# Altium PCB STS_WINGS.00.PcbDoc
Units mm, origin at the board's own origin, x right, y up, seen from the top; angles counter-clockwise.
Board outline 66.68 x 49.49 mm, 2 copper layers (Top Layer, Bottom Layer), stack 0.971 mm thick; 2 components, 4 nets, 7 pads, 2 vias.
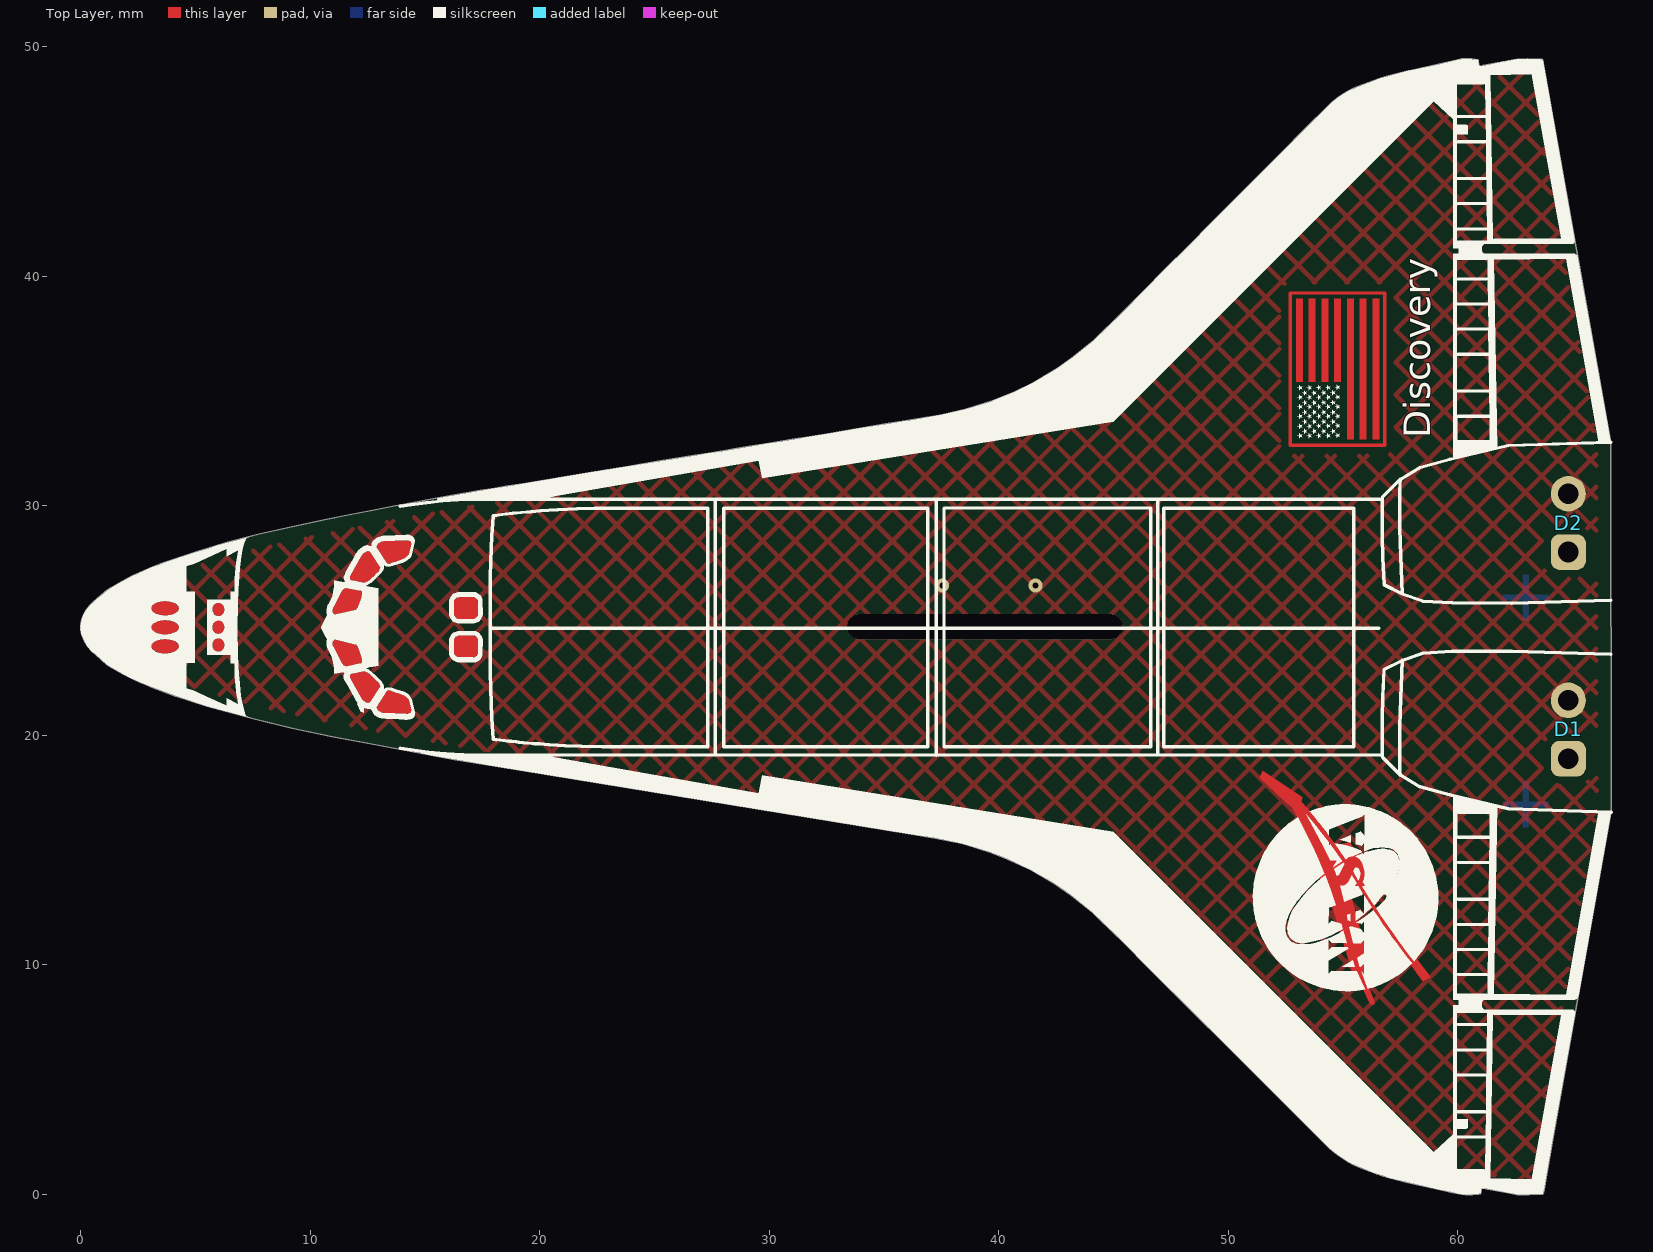
[diagram p0: Top Layer view]
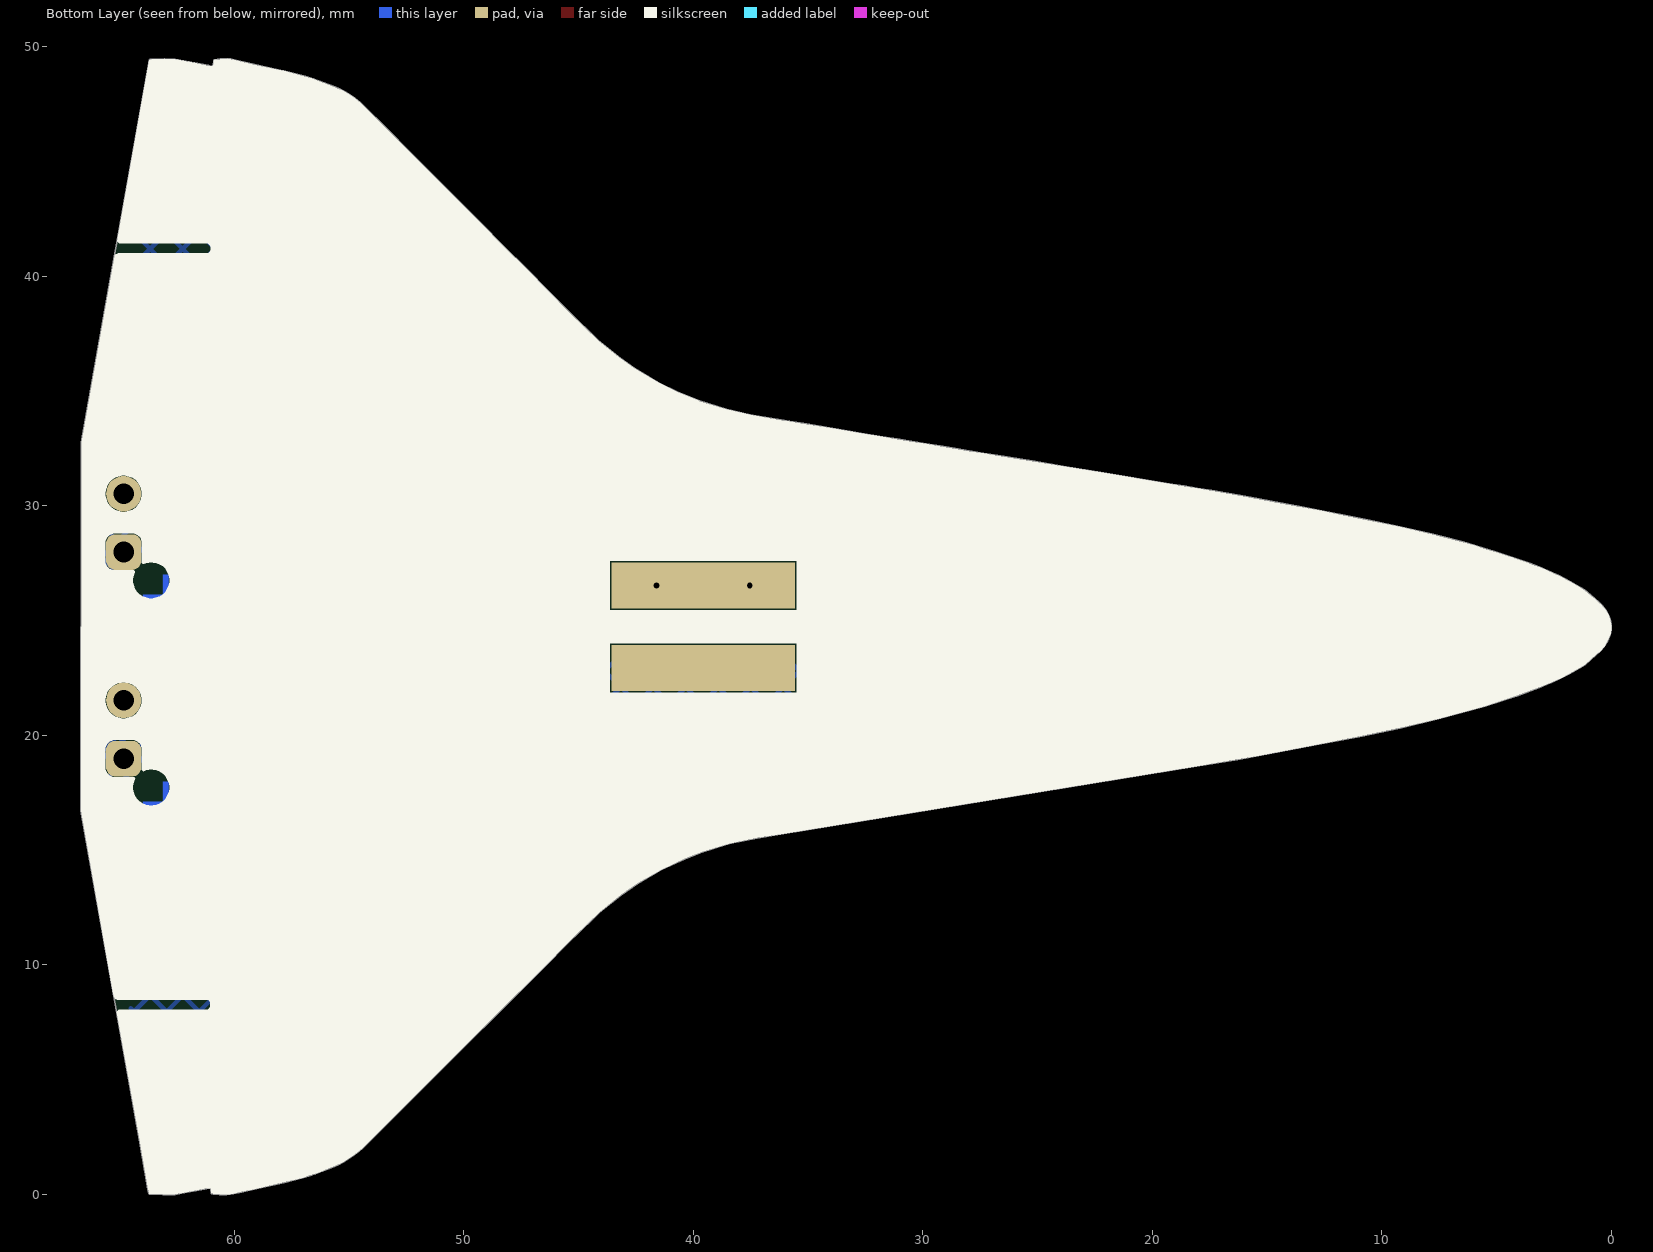
[diagram p1: Bottom Layer view, seen from below]

## Layer stack, top to bottom
Top Solder: solder mask 0.0102, Solder Resist, Dk 3.5
Top Layer: signal copper 0.0356
Dielectric1: core 0.9, FR-4, Dk 4.8
Bottom Layer: signal copper 0.0356
Bottom Solder: solder mask 0.0102, Solder Resist, Dk 3.5

## Board outline
1.163,23.077 1.371,22.947 1.828,22.68 2.171,22.508 2.644,22.286 3.148,22.083 4.145,21.711 5.511,21.272 7.522,20.72 9.209,20.314 10.975,19.945 12.971,19.568 15.376,19.112 16.286,18.946 18.077,18.653 36.191,15.69 37.221,15.524 38.354,15.293 38.599,15.237 39.612,14.916 40.345,14.634 41.403,14.144 42.431,13.541 43.158,13.043 44.099,12.285 45.186,11.235 46.779,9.642 48.373,8.048 49.966,6.455 53.158,3.274 54.417,2.015 54.575,1.877 ccw(c57.453,5.316) 55.087,1.506 ccw(c57.029,4.655) 55.459,1.305 55.651,1.218 55.873,1.125 56.166,1.004 56.464,0.894 56.766,0.798 56.997,0.728 57.836,0.522 59.129,0.224 59.689,0.108 60.033,0.032 60.182,0.01 60.334,0.002 60.334,0 60.644,0 60.914,0.014 60.993,0.039 61.01,0.073 61.015,0.172 61.015,0.245 61.032,0.27 61.086,0.27 61.3,0.239 62.3,0.051 62.587,-0.006 62.868,-0.003 63.116,0 63.691,0.02 63.708,0.026 63.722,0.046 63.761,0.229 64.139,2.383 65.144,8.035 65.257,8.635 66.684,16.715 66.665,32.776 65.223,40.872 65.127,41.453 63.705,49.423 63.677,49.454 63.595,49.462 63.046,49.484 62.578,49.467 61.717,49.318 61.122,49.197 60.998,49.164 60.948,49.172 60.92,49.217 60.9,49.371 60.894,49.4 60.886,49.425 60.863,49.445 60.863,49.444 60.615,49.481 60.292,49.487 60.154,49.473 60.016,49.448 59.126,49.234 58.089,49.011 57.842,48.96 56.884,48.715 56.625,48.642 55.611,48.256 55.417,48.172 ccw(c56.977,44.818) 54.53,47.592 54.375,47.445 53.361,46.434 52.33,45.401 51.319,44.381 50.297,43.362 49.275,42.337 48.275,41.326 47.239,40.298 46.34,39.391 45.394,38.434 44.152,37.228 43.18,36.44 42.567,36.012 42.355,35.868 41.508,35.372 40.668,34.956 39.733,34.581 38.559,34.212 37.528,33.978 37.272,33.931 36.165,33.753 35.813,33.7 35.202,33.595 33.941,33.384 33.307,33.28 32.687,33.173 31.75,33.024 31.13,32.92 30.491,32.815 29.854,32.714 29.257,32.615 28.604,32.508 27.99,32.401 27.351,32.303 26.742,32.201 25.246,31.961 23.75,31.716 22.254,31.469 19.263,30.974 18.626,30.869 18.04,30.771 17.421,30.672 16.801,30.565 16.179,30.458 15.357,30.303 14.791,30.202 13.608,29.985 12.619,29.791 11.707,29.61 10.634,29.396 9.212,29.098 7.832,28.78 7.322,28.65 6.472,28.43 5.973,28.287 5.542,28.154 5.109,28.022 ccw(c17.154,-10.827) 4.321,27.769 ccw(c11.691,5.601) 3.54,27.494 ccw(c9.214,12.253) 2.772,27.185 ccw(c7.134,16.965) 1.304,26.425 1.214,26.366 1.186,26.344 0.893,26.104 ccw(c2.924,23.428) 0.386,25.629 ccw(c1.37,24.681) 0.005,24.616 ccw(c1.731,24.905) 0.659,23.522

## Design rules (kind name [scope] priority, off if disabled: settings)
BoardOutlineClearance BoardOutlineClearance_1 [OnLayer('Top Overlay') OR OnLayer('Bottom Overlay')] p1: gap=0 ignorepadtopadclearanceinfootprint=FALSE except(0.01: Poly-OutlineEdge)
BoardOutlineClearance [NOT OnLayer('Top Overlay') AND NOT OnLayer('Bottom Overlay') AND NOT IsText] p2: gap=0.5 ignorepadtopadclearanceinfootprint=FALSE except(0: Arc-SplitContinuation Track-SplitContinuation SMDPad-SplitContinuation THPad-SplitContinuation Via-SplitContinuation Fill-SplitContinuation Poly-SplitContinuation Region-SplitContinuation Text-SplitContinuation)
Clearance [All] p1: gap=0.15 ignorepadtopadclearanceinfootprint=FALSE except(0: Arc-Hole Track-Hole SMDPad-Hole THPad-Hole Via-Hole Fill-Hole Poly-Hole Region-Hole Text-Hole; 0.3: Arc-Poly Track-Poly THPad-Poly Via-Poly Fill-Poly; 1.1: Poly-Poly)
DiffPairsRouting [All] p1: maxlimit=0.254 minlimit=0.254 mostfreqgap=0.254 toplayer_minwidth=0.2 toplayer_maxwidth=0.381 toplayer_prefwidth=0.381 bottomlayer_minwidth=0.2 bottomlayer_maxwidth=0.381 bottomlayer_prefwidth=0.381 maxuncoupledlength=12.7
HoleSize [All] p1: absolutevalues=TRUE maxlimit=10 minlimit=0.025 maxpercent=80.000 minpercent=20.000
PolygonConnect PolygonConnect_VIA [IsVia] p1: connectstyle=Direct reliefconductorwidth=0.254 reliefentries=4 polygonreliefangle="90 Angle" airgapwidth=0.254
PolygonConnect [All] p2: connectstyle=Direct reliefconductorwidth=0.254 reliefentries=4 polygonreliefangle="90 Angle" airgapwidth=0.254
RoutingVias [All] p1: holewidth=0.3 width=0.7 viastyle="Through Hole" minholewidth=0.3 minwidth=0.2 maxholewidth=0.6 maxwidth=1.2
SilkToSolderMaskClearance SilkscreenOverComponentPads [IsPad] p1: minsilkscreentomaskgap=0.254 clearancetoexposedcopper=TRUE
SolderMaskExpansion [All] p1: expansion=0.05 istentingtop=FALSE
Width [All] p1: maxlimit=5 minlimit=0.15 preferedwidth=0.25
27 further rules are at their usual default settings.

## Classes and differential pairs
component class F-16.00: D2

## Components (designator, comment, footprint, x,y, rotation, side; value= is the part's Value field where it differs from the comment)
D1 "Default 5mm Red LED" LED_5MM_RD 64.82,20.259 r90 top (schematic designator D?)
D2 "Default 5mm Red LED" LED_5MM_RD 64.82,29.259 r90 top (schematic designator D?)

## Footprints (in the part's own frame and the unit in brackets; to place one, negate y for a bottom-side part, rotate by r counter-clockwise, add the part's x,y. Pads: shape width x height; smd on the part's side, far side on the other; paste and mask are expansions set on the pad)
LED_5MM_RD [mm] "5mm LED RED"
  rrect50% 1.55x1.524 hole 0.9: 1(-1.27,0)
  oval 1.55x1.524 hole 0.9: 2(1.27,0)
  body extent -2.98,-10.4 2.44,4.4, height 6.11

## Part data
D1 D2: library part "LED Red 5mm", "=Description", Supplier Part Number 1=2335725, Supplier 1=Farnell

## Free pads (board coordinates)
  oval 12x1.1 hole 1.1 slot 12 at 0 deg: 0(39.4,24.735)
  rect 8x2 smd far side: 0(39.574,22.935) 0(39.574,26.535)

## Via types
v1: diameter 0.6, hole 0.25, Top Layer to Bottom Layer, tented top, 2 vias

## Nets (pads, with @x,y where several pads share a name; then routed paths per layer and width w, separated by ;. In a path a pad name is that pad's centre, name@x,y a point inside that pad or via, vN(x,y) a via of type N, cw(c..) or ccw(c..) an arc to the next point about the centre after c; other vN are vias at no path point)
ANODE: D1.1 D2.1 pad.0@39.574,22.935
CATHODE: D1.2 D2.2 pad.0@39.4,24.735 pad.0@39.574,26.535
  other v1: 37.54,26.531 41.609,26.531
GND: 
VBAT: 
copper on no net: | length 21.5
  Top Layer w0.15: 52.7,32.65 52.7,39.275 56.825,39.275 56.825,32.65 52.7,32.65

## Polygon pours and split planes (outlines as drawn)
no net on Top Overlay "NONET_L-01_P-001" (solid): 59.807,32.061 62.207,32.611 66.825,32.77 63.925,49.695 60.975,49.67 54.625,48.62 48.375,42.27 43.275,37.195 40.65,35.945 29.8,33.545 13.1,30.22 13.895,30.026 15.493,30.227 17.944,30.295 20.383,30.36 20.76,30.44 29.547,31.978 29.7,31.212 45.003,33.673 58.948,47.621 59.807,46.853 59.807,32.039
no net on Top Overlay "NONET_L-01_P-001" (solid): 59.807,17.409 62.207,16.859 66.825,16.7 63.925,-0.225 60.975,-0.2 54.625,0.85 48.375,7.2 43.275,12.275 40.65,13.525 29.8,15.925 13.1,19.25 13.895,19.444 15.493,19.243 17.944,19.175 20.383,19.11 20.76,19.03 29.547,17.492 29.7,18.258 45.003,15.797 58.948,1.849 59.807,2.617 59.807,17.431
no net on Top Overlay "NONET_L-01_P-001" (solid): 7.459,20.744 7.285,20.804 7.231,20.833 7.175,20.897 7.148,20.974 7.002,21.604 6.961,21.939 6.93,22.276 6.899,22.649 6.86,23.491 6.839,24.642 6.854,25.75 6.876,26.348 6.938,27.281 6.997,27.804 7.038,28.064 7.103,28.329 7.193,28.561 7.333,28.642 7.329,28.809 0.895,27.059 -0.355,25.784 -0.505,24.609 0.42,23.184 4.295,21.009 7.445,20.534
CATHODE on Top Layer "T" (hatched 45Degree grid 1 track 0.2, pour order 1): -3.927,51.427 72.423,51.427 72.423,-2.491 -3.927,-2.491
no net on Bottom Overlay "NONET_L-01_P-001" (solid): 69.07,52.009 67.82,-1.741 55.57,-2.241 40.82,7.759 -0.43,17.259 -2.68,26.759 4.07,31.259 37.57,37.509 50.32,51.509
ANODE on Bottom Layer "T" (hatched 45Degree grid 1 track 0.2, pour order 3): -3.927,51.427 72.423,51.427 72.423,-2.491 -3.927,-2.491

## Other copper
Top Layer:
  region: 16.297,25.214 16.289,25.231 16.283,25.251 16.277,25.29 16.278,25.291 16.278,25.547 16.275,25.803 16.277,25.82 16.28,25.839 16.292,25.879 16.317,25.925 16.354,25.961 16.396,25.989 16.444,26.006 16.494,26.015 17.108,26.017 17.125,26.017 cw(c17.11,25.827) 17.3,25.848 17.3,25.831 17.3,25.832 17.303,25.553 17.303,25.257 cw(c17.117,25.274) 17.131,25.088 17.114,25.085 16.5,25.083 16.461,25.085 16.441,25.09 16.421,25.096 16.401,25.104 16.382,25.116 16.348,25.142 16.32,25.175
  region: 16.323,23.502 16.308,23.522 16.297,23.544 16.289,23.567 16.28,23.586 16.275,23.632 16.278,23.888 16.278,24.142 16.277,24.141 16.283,24.181 16.289,24.2 16.297,24.22 16.297,24.221 16.331,24.274 16.348,24.291 16.365,24.305 16.404,24.331 16.452,24.347 16.5,24.35 17.114,24.347 17.131,24.347 cw(c17.106,24.135) 17.235,24.305 17.249,24.293 17.249,24.294 17.272,24.263 17.289,24.232 17.3,24.195 17.303,24.159 17.303,23.88 17.3,23.601 17.297,23.567 17.288,23.539 17.277,23.513 17.277,23.514 17.269,23.5 cw(c16.742,23.932) 17.256,23.485 cw(c17.003,23.704) 17.243,23.47 cw(c17.119,23.587) 17.196,23.435 17.182,23.429 17.181,23.429 17.162,23.423 17.145,23.418 17.125,23.418 17.108,23.415 16.494,23.421 16.494,23.42 16.475,23.42 16.455,23.423 16.435,23.429 16.415,23.434 16.416,23.435 16.359,23.469 16.359,23.468 16.339,23.485
  region: 5.88,25.248 5.886,25.245 5.889,25.242 5.894,25.239 5.897,25.239 5.908,25.234 5.911,25.231 5.917,25.231 5.922,25.228 5.925,25.225 5.931,25.225 5.937,25.223 5.939,25.223 5.945,25.22 5.948,25.22 5.953,25.217 5.965,25.217 5.97,25.214 5.987,25.214 5.99,25.211 6.015,25.211 6.021,25.214 6.038,25.214 6.046,25.217 6.058,25.217 6.063,25.22 6.069,25.22 6.075,25.223 6.08,25.225 6.083,25.225 6.1,25.234 6.105,25.234 cw(c6.184,25.125) 6.111,25.238 cw(c6.306,24.94) 6.117,25.242 6.124,25.246 ccw(c5.774,25.822) 6.136,25.254 6.142,25.256 6.145,25.259 6.151,25.262 6.156,25.268 6.165,25.276 6.17,25.279 6.173,25.282 6.176,25.287 6.182,25.29 6.184,25.296 ccw(c6.102,25.387) 6.199,25.311 ccw(c6.073,25.41) 6.211,25.329 ccw(c5.993,25.456) 6.22,25.347 ccw(c4.916,25.956) 6.238,25.386 6.241,25.394 6.243,25.4 6.246,25.408 6.246,25.414 ccw(c6.09,25.463) 6.252,25.44 ccw(c5.92,25.487) 6.255,25.504 ccw(c6.016,25.497) 6.246,25.561 6.243,25.569 6.243,25.575 6.241,25.58 6.237,25.589 ccw(c5.775,25.406) 6.229,25.608 ccw(c5.953,25.486) 6.221,25.625 6.218,25.631 6.215,25.639 6.21,25.645 6.207,25.651 6.204,25.656 6.201,25.659 6.198,25.665 6.193,25.668 6.19,25.67 6.187,25.676 6.179,25.684 6.179,25.685 6.165,25.699 6.159,25.702 6.156,25.708 6.153,25.71 6.148,25.713 6.142,25.718 6.136,25.721 6.134,25.724 6.128,25.727 6.125,25.727 6.12,25.73 6.117,25.732 6.111,25.735 6.108,25.738 6.103,25.738 6.1,25.741 6.094,25.744 6.091,25.744 6.086,25.746 6.083,25.749 6.077,25.749 6.072,25.752 6.069,25.752 6.063,25.755 6.055,25.755 6.049,25.758 6.038,25.758 6.035,25.76 5.976,25.76 5.967,25.758 5.959,25.758 5.953,25.755 ccw(c5.977,25.609) 5.928,25.748 ccw(c5.999,25.552) 5.918,25.745 cw(c5.759,26.114) 5.894,25.735 5.889,25.73 5.886,25.727 5.88,25.727 5.877,25.724 5.872,25.721 5.866,25.715 5.86,25.713 5.855,25.707 5.849,25.701 5.846,25.699 5.844,25.696 5.838,25.693 5.832,25.687 5.83,25.682 ccw(c5.894,25.599) 5.801,25.648 5.799,25.645 5.799,25.642 5.796,25.637 5.793,25.634 ccw(c6,25.497) 5.785,25.621 ccw(c5.868,25.573) 5.781,25.612 ccw(c5.863,25.576) 5.778,25.605 cw(c5.316,25.749) 5.77,25.583 5.768,25.577 5.765,25.569 cw(c5.669,25.579) 5.763,25.559 cw(c5.491,25.617) 5.761,25.549 ccw(c6.108,25.462) 5.758,25.539 ccw(c5.837,25.52) 5.756,25.518 5.753,25.51 5.753,25.47 5.756,25.462 ccw(c6.031,25.477) 5.875,25.251
  region: 153 vertices and 0 holes, not listed, extent 5.753,23.668 6.255,24.217
  region: 174 vertices and 0 holes, not listed, extent 5.753,24.44 6.255,24.989
  region: 162 vertices and 0 holes, not listed, extent 3.098,25.239 4.272,25.839
  region: 3.106,24.662 3.106,24.665 3.103,24.671 3.103,24.679 3.101,24.685 3.101,24.704 3.098,24.707 3.098,24.716 3.101,24.718 3.101,24.735 3.103,24.741 3.103,24.749 3.106,24.752 3.106,24.758 3.109,24.761 3.109,24.766 3.112,24.769 3.112,24.775 3.118,24.78 3.118,24.786 3.123,24.792 3.123,24.797 3.129,24.803 3.132,24.809 3.137,24.814 3.137,24.82 3.151,24.834 3.154,24.84 3.157,24.842 cw(c3.525,24.437) 3.334,24.95 cw(c3.736,23.9) 3.388,24.969 3.427,24.98 3.447,24.983 3.447,24.984 3.467,24.99 3.486,24.992 3.506,24.995 3.526,24.998 3.526,24.997 3.557,25.003 3.591,25.006 3.622,25.009 3.726,25.009 cw(c3.684,23.862) 3.925,24.984 cw(c3.752,24.2) 4.022,24.956 cw(c3.806,24.351) 4.113,24.915 cw(c3.855,24.44) 4.196,24.859 4.202,24.854 4.205,24.851 4.207,24.848 4.213,24.842 ccw(c4.428,25.026) 4.221,24.833 4.225,24.829 cw(c4.104,24.72) 4.229,24.825 cw(c4.125,24.737) 4.233,24.82 4.236,24.814 4.238,24.811 4.241,24.806 4.244,24.803 4.247,24.797 4.25,24.795 4.252,24.789 4.252,24.783 4.255,24.78 4.261,24.769 4.261,24.766 4.264,24.761 cw(c4.236,24.744) 4.268,24.747 cw(c4.11,24.726) 4.269,24.741 ccw(c4.316,24.745) 4.27,24.735 ccw(c4.289,24.74) 4.272,24.73 4.272,24.685 4.269,24.685 4.269,24.673 ccw(c4.271,24.669) 4.266,24.669 cw(c4.253,24.668) 4.265,24.662 cw(c4.218,24.682) 4.261,24.654 4.261,24.648 4.258,24.642 cw(c4.089,24.719) 4.252,24.63 cw(c4.162,24.682) 4.246,24.621 4.241,24.614 4.238,24.609 4.233,24.603 4.23,24.597 cw(c3.654,25.107) 4.198,24.563 cw(c4.052,24.713) 4.183,24.55 cw(c4.051,24.715) 4.165,24.537 cw(c3.981,24.826) 4.143,24.524 4.134,24.516 4.112,24.504 cw(c3.762,25.178) 3.902,24.432 cw(c3.683,25.555) 3.565,24.417 3.526,24.423 3.526,24.424 3.486,24.429 3.467,24.435 3.447,24.438 3.447,24.437 3.427,24.443 3.388,24.454 cw(c3.596,25.172) 3.285,24.492 cw(c3.496,24.947) 3.237,24.518 cw(c3.443,24.862) 3.151,24.586 3.146,24.592 3.14,24.603 3.134,24.606 3.123,24.628 3.118,24.634 3.118,24.637 3.115,24.642 3.112,24.648 3.112,24.651
  region: 3.101,23.851 3.103,23.848 3.103,23.84 3.106,23.837 3.106,23.831 3.109,23.829 3.109,23.823 3.115,23.817 3.12,23.806 ccw(c3.415,23.978) 3.284,23.663 ccw(c3.588,24.318) 3.396,23.622 ccw(c3.683,24.652) 3.51,23.597 ccw(c3.73,24.926) 3.616,23.584 3.712,23.584 ccw(c3.715,24.414) 3.828,23.591 ccw(c3.704,24.587) 3.953,23.615 ccw(c3.838,24.062) 4.005,23.631 4.022,23.637 4.022,23.638 4.041,23.643 4.061,23.652 4.061,23.651 4.078,23.66 4.098,23.668 4.114,23.677 4.131,23.688 4.14,23.691 4.145,23.696 4.151,23.699 4.157,23.705 4.162,23.707 4.168,23.713 4.176,23.716 4.182,23.722 4.188,23.724 4.193,23.73 4.199,23.736 4.202,23.741 4.207,23.747 4.213,23.75 4.219,23.755 4.224,23.761 4.227,23.767 4.236,23.775 4.238,23.781 4.241,23.784 cw(c4.483,23.673) 4.25,23.801 4.254,23.809 4.259,23.817 ccw(c3.802,24.074) 4.264,23.826 4.264,23.831 4.267,23.837 cw(c4.332,23.831) 4.27,23.852 ccw(c4.214,23.872) 4.271,23.858 ccw(c4.231,23.867) 4.272,23.865 ccw(c4.177,23.869) 4.272,23.876 4.272,23.905 4.269,23.907 4.269,23.919 4.267,23.922 4.267,23.927 4.264,23.933 4.261,23.941 4.255,23.952 4.25,23.964 4.241,23.981 ccw(c3.941,23.743) 4.158,24.058 ccw(c3.834,23.593) 4.127,24.079 ccw(c3.628,23.252) 4.092,24.099 4.081,24.105 4.072,24.107 4.061,24.113 4.061,24.114 4.05,24.117 4.017,24.129 3.991,24.138 ccw(c3.713,23.202) 3.883,24.164 ccw(c3.616,22.674) 3.81,24.175 3.779,24.178 3.757,24.178 3.734,24.181 3.686,24.181 3.627,24.181 3.596,24.178 3.568,24.176 3.568,24.175 3.54,24.172 ccw(c3.716,22.994) 3.386,24.138 ccw(c3.593,23.432) 3.309,24.111 ccw(c3.512,23.626) 3.238,24.075 ccw(c3.436,23.75) 3.177,24.029 3.174,24.026 3.165,24.021 3.16,24.015 3.149,24.004 3.146,23.998 3.143,23.995 3.14,23.989 3.134,23.986 3.132,23.981 ccw(c3.19,23.933) 3.124,23.969 ccw(c3.252,23.896) 3.117,23.955 ccw(c3.176,23.929) 3.115,23.95 3.112,23.947 3.112,23.941 3.109,23.938 3.109,23.933 3.106,23.927 3.106,23.924 3.103,23.919 3.103,23.916 3.101,23.91 3.101,23.891 3.098,23.888 3.098,23.876 3.101,23.874
  pour cut-out: 56.575,32.9 52.96,32.9 52.96,39.017 56.575,39.017
  region: 56.297,39.017 56.297,32.9 56.575,32.9 56.575,39.017
  region: 55.741,39.017 55.741,32.9 56.019,32.9 56.019,39.017
  region: 55.185,39.017 55.185,32.9 55.463,32.9 55.463,39.017
  region: 54.629,39.017 54.629,35.402 54.907,35.402 54.907,39.017
  region: 54.073,39.017 54.073,35.402 54.351,35.402 54.351,39.017
  region: 53.517,39.017 53.517,35.402 53.795,35.402 53.795,39.017
  region: 52.96,39.017 52.96,35.402 53.239,35.402 53.239,39.017
  region net CATHODE: 53.345,14.96 54.248,13.261 56.507,13.407 55.293,15.355
  region net CATHODE: 54.446,12.814 55.49,9.454 56.309,9.539 55.321,13.096
  region net CATHODE: 52.79,16.825 51.368,18.162 51.509,18.461 53.232,17.303 53.186,17.106
  region net CATHODE: 56.328,12.389 56.267,12.341 58.483,9.285 58.822,9.471 56.494,12.518
  region net CATHODE: 55.519,9.735 55.779,9.735 55.924,9.584 56.366,8.409 56.366,8.297 56.196,8.297 55.754,9.228
  region net CATHODE: 54.966,9.932 55.779,9.932 55.779,9.926 55.924,10.071 55.924,10.507
  region net CATHODE: 55.603,9.735 55.805,9.284 56.028,8.839 56.266,8.409 55.81,9.698 55.779,9.733
  region net CATHODE: 55.22,10.764 55.235,10.712 55.324,10.764
  region net CATHODE: 55.519,9.928 55.733,9.926 55.614,10.32 55.417,10.2
  region net CATHODE: 55.157,10.957 55.443,10.957 55.266,11.714 54.925,11.805
  region net CATHODE: 54.857,12.046 55.219,11.943 55.178,12.178 54.857,12.054
  region net CATHODE: 54.614,14.199 54.562,14.167 54.572,14.069 54.603,13.976 54.635,13.935 54.681,13.903 54.733,13.898
  region net CATHODE: 54.692,12.603 55.059,12.748 54.956,13.183 54.883,13.442 54.795,13.458 54.702,13.494 54.614,13.546 54.541,13.619 54.474,13.707 54.422,13.805 54.386,13.914 54.365,14.023 54.225,13.918
  region net CATHODE: 55.018,14.459 55.852,13.143 56.251,12.506 56.328,12.389 56.748,11.755 57.23,11.076 57.727,10.419 57.996,10.092 58.038,10.045 58.276,9.781 58.577,9.481 58.608,9.471 58.634,9.486 58.634,9.516 58.266,9.951 57.908,10.402 57.344,11.173 56.795,11.956 56.444,12.476 56.354,12.61 56.261,12.748 55.831,13.433 55.753,13.556 55.458,14.054 55.158,14.54
  region net CATHODE: 51.573,18.193 51.645,18.131 51.91,17.903 52.153,17.654 52.386,17.39 52.593,17.115 52.79,16.825 53.027,16.431 53.117,16.281 53.412,15.722 53.692,15.152 53.951,14.572 54.194,13.983 54.36,14.111 54.381,14.256 54.432,14.39 54.417,14.416 54.326,14.556 54.453,14.556 54.319,14.831 53.407,16.571 54.215,15.566 54.603,15.048 54.976,14.52 55.116,14.598 54.738,15.157 54.346,15.701 53.734,16.499 53.476,16.801 53.186,17.106 52.838,17.423 52.564,17.638 52.302,17.816 52.021,17.98 51.837,18.074
  region: 12.909,21.238 12.909,21.198 12.923,21.159 12.952,21.12 12.988,21.08 13.036,21.049 13.112,21.012 13.157,20.998 13.208,20.99 14.188,20.95 14.261,20.953 14.309,20.962 14.358,20.987 14.379,21.004 14.396,21.029 14.41,21.066 14.408,21.103 14.405,21.117 14.29,21.55 14.258,21.595 14.209,21.646 14.172,21.676 14.137,21.702 14.106,21.725 14.07,21.747 13.851,21.829 13.739,21.866 13.627,21.904 13.515,21.946 13.478,21.956 13.436,21.961 13.361,21.947
  region: 11.836,22.691 11.807,22.681 11.789,22.671 11.777,22.663 11.755,22.632 11.749,22.615 11.746,22.598 11.746,22.561 11.752,22.533 11.76,22.505 11.78,22.465 12.256,21.618 12.264,21.601 12.276,21.587 12.298,21.556 12.335,21.516 12.374,21.483 12.425,21.454 12.45,21.443 12.505,21.428 12.531,21.426 12.585,21.438 12.602,21.446 13.062,22.147 13.045,22.184 13.025,22.218 13.005,22.249 12.985,22.283 12.963,22.314 12.935,22.342 12.918,22.353 12.901,22.367 12.746,22.522 12.704,22.561 12.678,22.584 12.619,22.643 12.608,22.657 12.572,22.689 12.509,22.736 12.411,22.781 12.357,22.794
  region: 11.597,23.023 11.583,23.023 11.566,23.027 11.507,23.046 11.493,23.054 11.479,23.065 11.42,23.116 11.377,23.178 11.028,23.862 11.017,23.885 11.006,23.913 11,23.939 10.994,23.963 10.993,24.029 10.996,24.051 11,24.074 11.006,24.091 11.017,24.11 11.028,24.127 11.051,24.147 11.068,24.157 11.084,24.164 11.103,24.167 11.113,24.167 11.986,23.961 12.005,23.943 12.034,23.912 12.071,23.858 12.079,23.845 12.095,23.803 12.225,23.417 12.239,23.381 12.248,23.335 12.252,23.296 12.253,23.274 12.25,23.206 12.248,23.19 12.239,23.175 12.228,23.164 12.205,23.147 12.172,23.136
  region: 12.909,28.207 12.909,28.246 12.923,28.286 12.952,28.325 12.988,28.365 13.036,28.396 13.112,28.432 13.157,28.446 13.208,28.455 14.188,28.494 14.261,28.491 14.309,28.482 14.358,28.458 14.379,28.441 14.396,28.415 14.41,28.379 14.408,28.342 14.405,28.328 14.29,27.894 14.258,27.849 14.209,27.798 14.172,27.769 14.137,27.742 14.106,27.72 14.07,27.697 13.851,27.616 13.739,27.578 13.627,27.54 13.515,27.499 13.478,27.489 13.436,27.483 13.361,27.498
  region: 11.836,26.754 11.807,26.763 11.789,26.774 11.777,26.782 11.755,26.813 11.749,26.83 11.746,26.847 11.746,26.883 11.752,26.911 11.76,26.94 11.78,26.979 12.256,27.827 12.264,27.844 12.276,27.858 12.298,27.889 12.335,27.928 12.374,27.962 12.425,27.99 12.45,28.001 12.505,28.016 12.531,28.019 12.585,28.007 12.602,27.999 13.062,27.297 13.045,27.261 13.025,27.227 13.005,27.196 12.985,27.162 12.963,27.131 12.935,27.103 12.918,27.092 12.901,27.078 12.746,26.923 12.704,26.883 12.678,26.861 12.619,26.802 12.608,26.787 12.572,26.756 12.509,26.709 12.411,26.664 12.357,26.65
  region: 11.597,26.422 11.583,26.421 11.566,26.418 11.507,26.399 11.493,26.39 11.479,26.379 11.42,26.329 11.377,26.267 11.028,25.582 11.017,25.56 11.006,25.532 11,25.506 10.994,25.481 10.993,25.416 10.996,25.394 11,25.371 11.006,25.354 11.017,25.334 11.028,25.317 11.051,25.298 11.068,25.288 11.084,25.281 11.103,25.278 11.113,25.278 11.986,25.484 12.005,25.502 12.033,25.533 12.071,25.586 12.079,25.599 12.095,25.641 12.225,26.027 12.239,26.064 12.248,26.109 12.252,26.149 12.253,26.171 12.25,26.239 12.248,26.254 12.239,26.269 12.228,26.281 12.205,26.297 12.172,26.309
Bottom Layer:
  text "+" at 64.309,27.773 h4 r180
  text "+" at 64.309,18.748 h4 r180

## Silkscreen, mask and mechanical layers (free items; w line width, h text height)
Top Overlay:
  drawing of 235 lines, arcs and shapes, not listed
  text "Discovery" at 59.2,32.95 h2 r90
Bottom Overlay:
  pour cut-out: 65.144,8.052 61.23,8.052 cw(c61.23,8.235) 61.048,8.235 61.048,8.321 cw(c61.215,8.321) 61.215,8.488 65.077,8.488 ccw(c65.077,8.657) 65.246,8.657
  pour cut-out: 65.128,41.436 61.215,41.436 ccw(c61.215,41.254) 61.032,41.254 61.032,41.168 ccw(c61.2,41.168) 61.2,41 65.061,41 cw(c65.061,40.831) 65.23,40.831
  pour cut-out: 64.445,19.784 ccw(c64.445,19.384) 64.045,19.384 64.045,18.584 ccw(c64.42,18.584) 64.42,18.209 65.22,18.209 ccw(c65.22,18.584) 65.595,18.584 65.595,19.384 ccw(c65.195,19.384) 65.195,19.784
  pour cut-out: 64.445,28.784 ccw(c64.445,28.384) 64.045,28.384 64.045,27.584 ccw(c64.42,27.584) 64.42,27.209 65.22,27.209 ccw(c65.22,27.584) 65.595,27.584 65.595,28.384 ccw(c65.195,28.384) 65.195,28.784
  pour cut-out: 64.044,30.529 ccw(c64.82,30.529) 64.82,29.754 ccw(c64.82,30.529) 65.595,30.529 ccw(c64.82,30.529) 64.82,31.305 ccw(c64.82,30.529)
  pour cut-out: 64.044,21.529 ccw(c64.82,21.529) 64.82,20.754 ccw(c64.82,21.529) 65.595,21.529 ccw(c64.82,21.529) 64.82,22.305 ccw(c64.82,21.529)
  pour cut-out: 62.844,26.759 ccw(c63.62,26.759) 63.62,25.984 ccw(c63.62,26.759) 64.395,26.759 ccw(c63.62,26.759) 63.62,27.535 ccw(c63.62,26.759)
  pour cut-out: 62.844,17.734 ccw(c63.62,17.734) 63.62,16.959 ccw(c63.62,17.734) 64.395,17.734 ccw(c63.62,17.734) 63.62,18.51 ccw(c63.62,17.734)
  pour cut-out: 35.52,25.484 35.52,27.584 43.62,27.584 43.62,25.484
  pour cut-out: 35.52,21.884 35.52,23.984 43.62,23.984 43.62,21.884
Top Solder:
  region: 52.96,39.017 52.96,35.402 54.91,35.402 54.91,32.9 56.575,32.9 56.575,39.017
Bottom Solder:
  region: 62.844,17.734 ccw(c63.62,17.734) 63.62,16.959 ccw(c63.62,17.734) 64.395,17.734 ccw(c63.62,17.734) 63.62,18.51 ccw(c63.62,17.734)
  region: 62.844,26.759 ccw(c63.62,26.759) 63.62,25.984 ccw(c63.62,26.759) 64.395,26.759 ccw(c63.62,26.759) 63.62,27.535 ccw(c63.62,26.759)
Outline:
  drawing of 163 lines, arcs and shapes, not listed

## Dimensions
66.684,16.715 to 0,24.752 on Fabrication
60.644,0 to 62.578,49.467 on Fabrication

## Text inside footprints (layer, text, board x,y; h text height)
D1: Assembly Top "D" at 64.957,20.832 h1 r180
D2: Assembly Top "D" at 64.957,29.832 h1 r180